# Altium PCB V.PcbDoc
Units mm, origin at the board's own origin, x right, y up, seen from the top; angles counter-clockwise.
Board outline 152.4 x 101.6 mm, 4 copper layers (Top Layer, Internal Plane 1, Internal Plane 2, Bottom Layer); 10 components, 11 nets, 83 pads, 42 vias.
Unrouted connection lines stored in the file: 8.
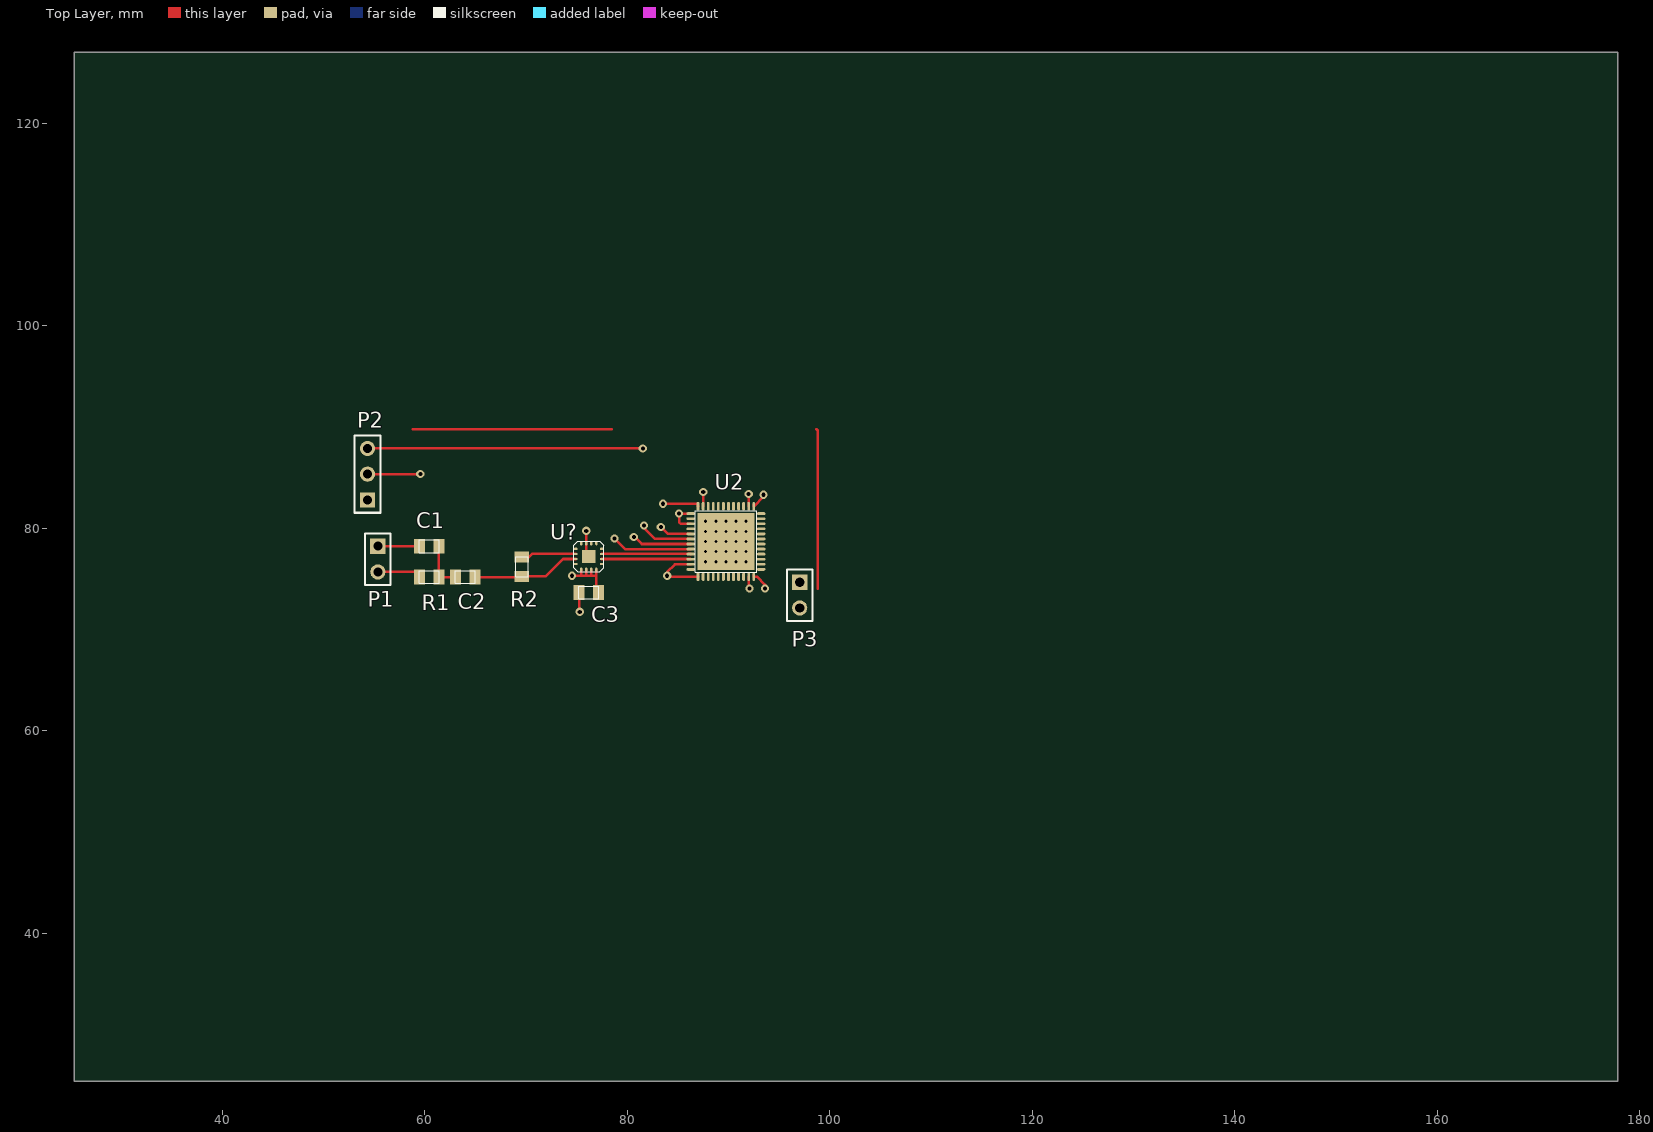
[diagram p0: Top Layer view]
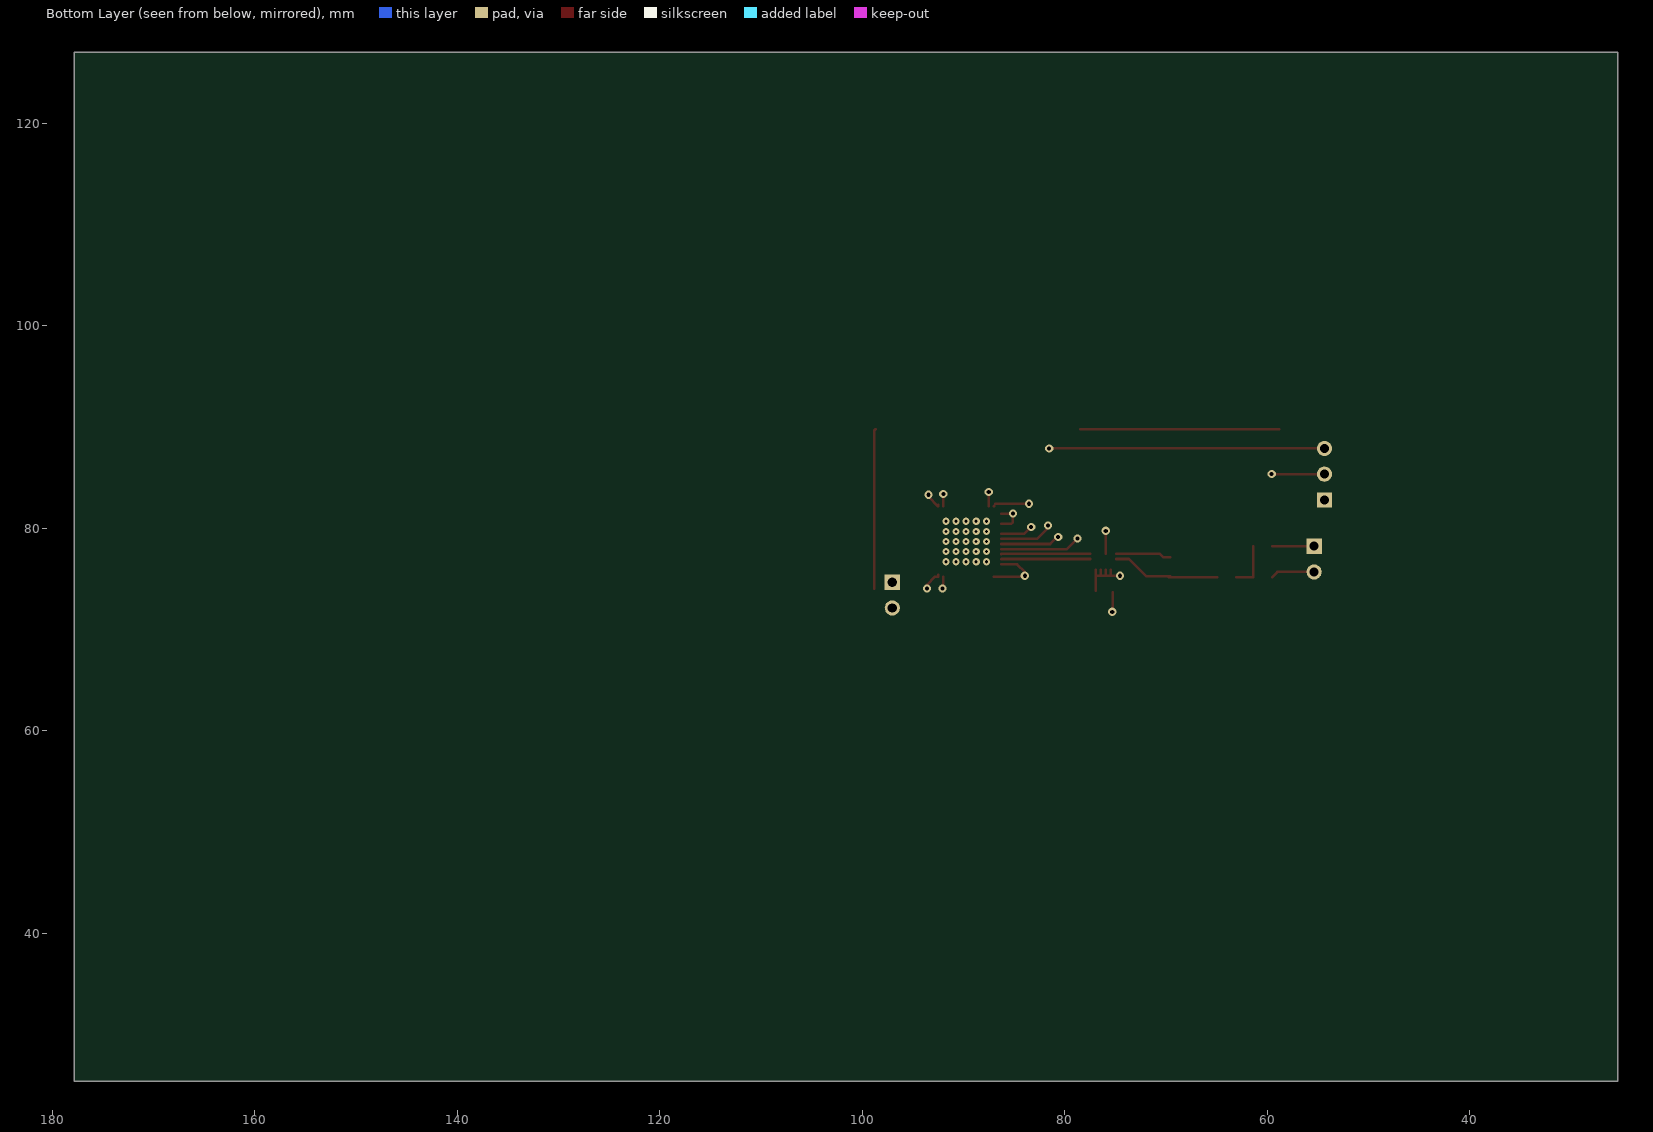
[diagram p1: Bottom Layer view, seen from below]
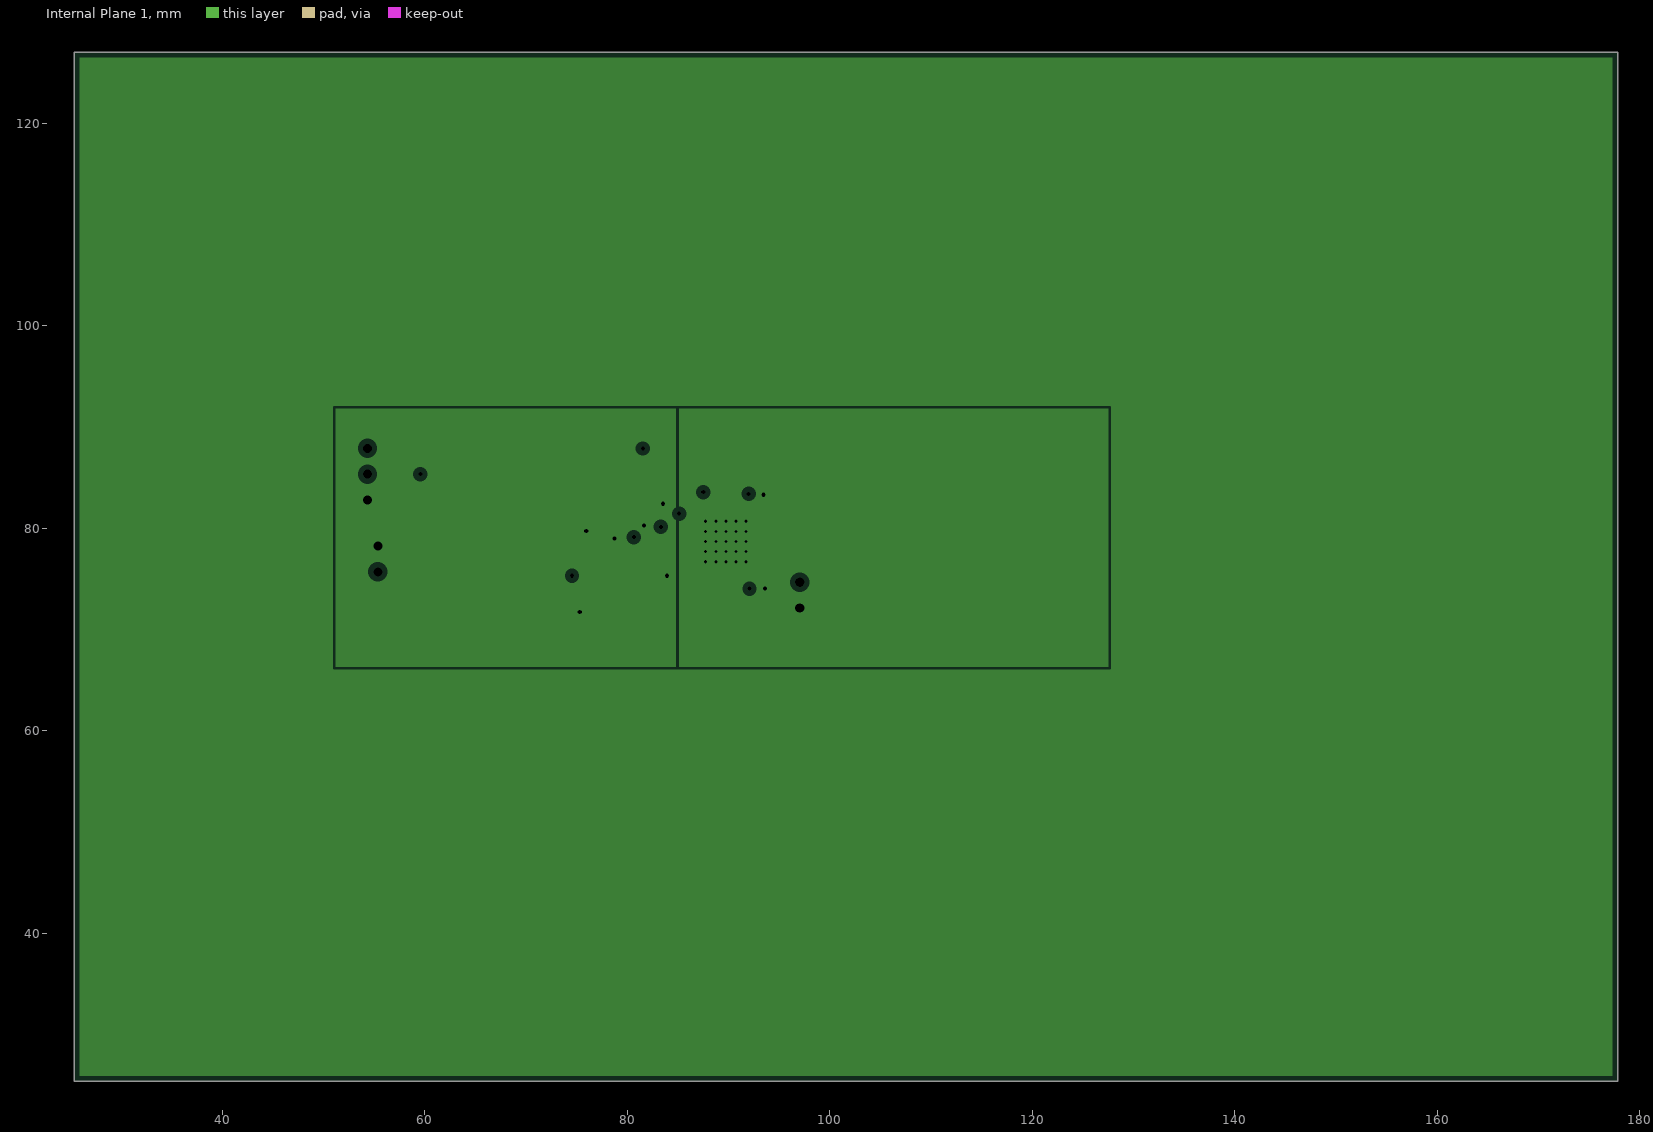
[diagram p2: Internal Plane 1, clearances drawn from the general rule]
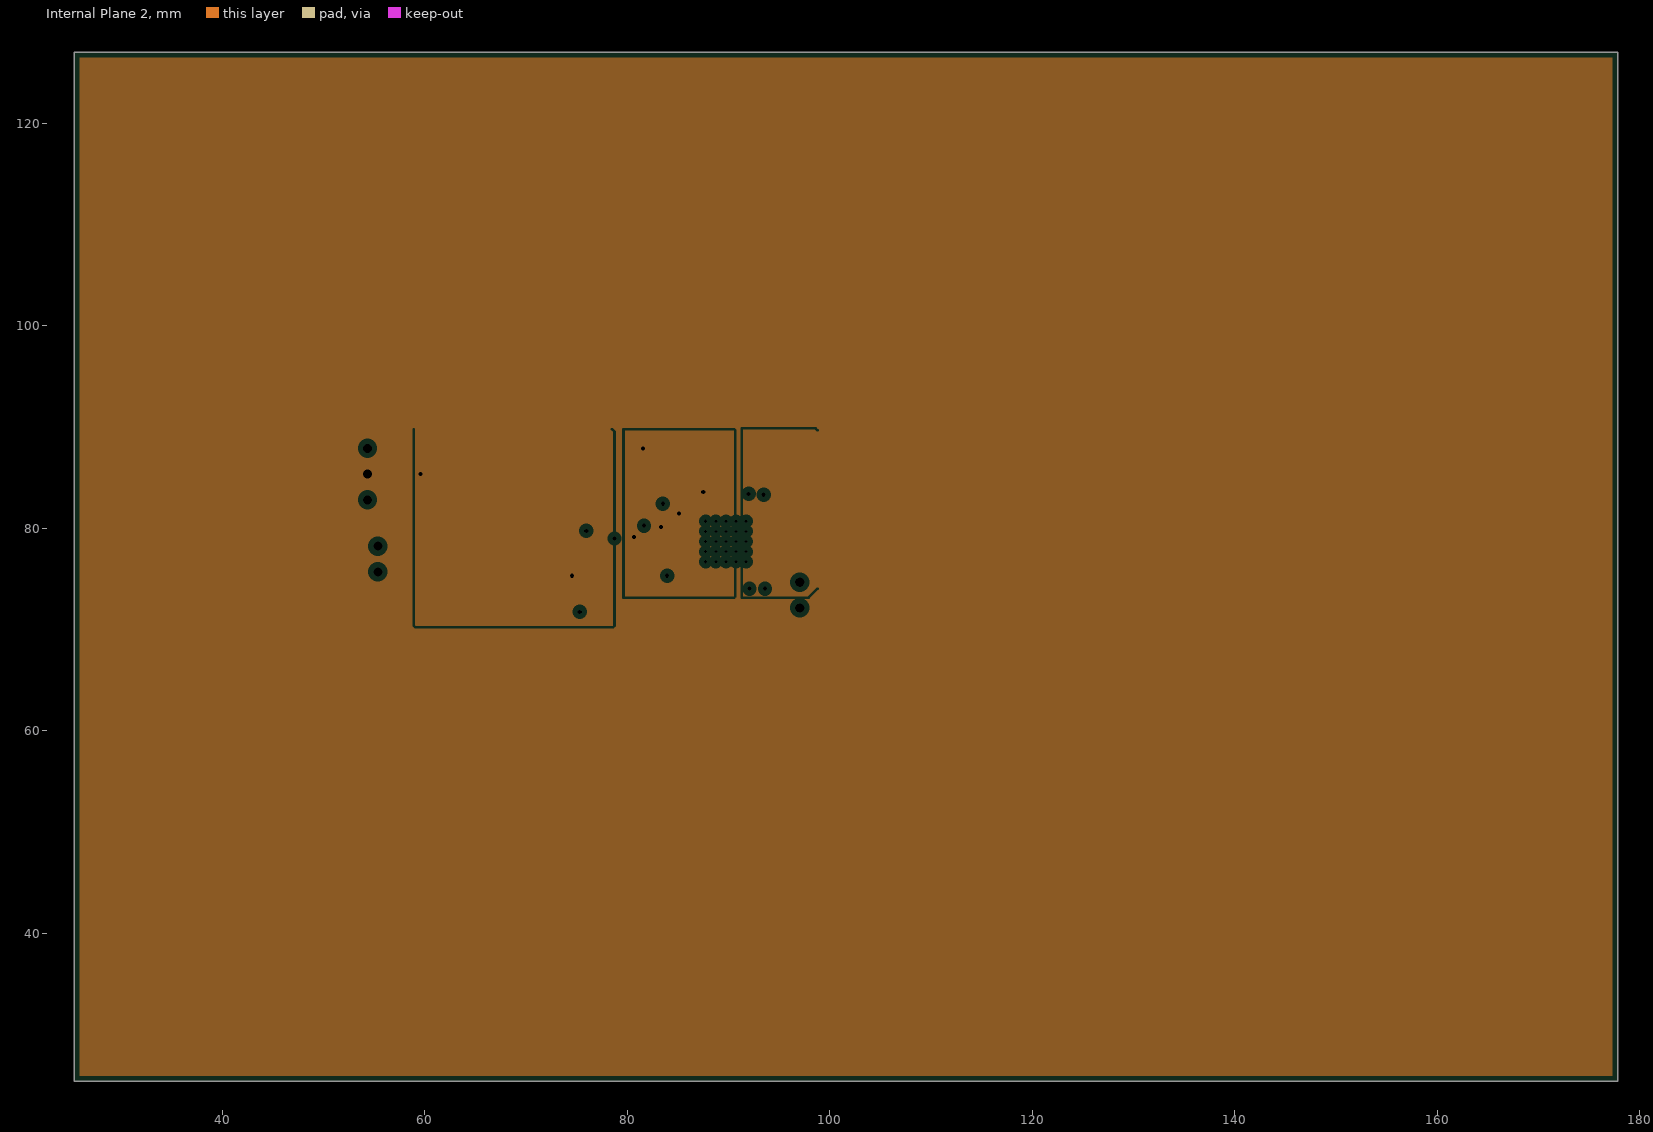
[diagram p3: Internal Plane 2, clearances drawn from the general rule]

## Layer stack, top to bottom
Top Layer: signal copper 0.0356
Dielectric: core 0.32, FR-4, Dk 4.8
Internal Plane 1: plane copper 0.0356, net (Multiple Nets)
Dielectric: prepreg 0.32, FR-4, Dk 4.8
Internal Plane 2: plane copper 0.0356, net (Multiple Nets)
Dielectric: core 0.32, FR-4, Dk 4.8
Bottom Layer: signal copper 0.0356

## Board outline
25.4,25.4 177.8,25.4 177.8,127 25.4,127

## Design rules (kind name [scope] priority, off if disabled: settings)
Clearance [All] p1: gap=0
MinimumSolderMaskSliver [All] p1 off: minsoldermaskwidth=0.254
PlaneClearance [All] p1: clearance=0.508
PlaneConnect [All] p1: planeconnectstyle=Relief reliefexpansion=0.508 reliefentries=4 reliefconductorwidth=0.254 reliefairgap=0.254
PolygonConnect [All] p1: connectstyle=Relief reliefconductorwidth=0.254 reliefentries=4 polygonreliefangle="90 Angle"
RoutingVias [All] p1 off: holewidth=0.711 width=1.27 viastyle="Through Hole" minholewidth=0.711 minwidth=0.635 maxholewidth=0.711 maxwidth=1.524
SilkscreenOverComponentPads [All] p1 off: minsilkscreentomaskgap=0.254
SolderMaskExpansion [All] p1: expansion=0.102
Width [All] p1: maxlimit=0.254 minlimit=0.254 preferedwidth=0.254
24 further rules are at their usual default settings.

## Components (designator, comment, footprint, x,y, rotation, side; value= is the part's Value field where it differs from the comment)
C1 "3.3pF" 0805 60.452,78.232 r180 top
C2 "3.3pF" 0805 64.008,75.184 r0 top
C3 "0.1uF" 0805 76.2,73.66 r180 top
P1 "Header 2" HDR1X2 55.372,78.232 r270 top
P2 "Header 3" HDR1X3 54.356,82.804 r90 top
P3 "Header 2" HDR1X2 97.028,74.676 r270 top
R1 "4.7k" 0805 60.452,75.184 r0 top
R2 "1.5k" 0805 69.596,76.2 r270 top
U2 "ADS61B49" QFN-48 93.218,75.946 r180 top
U? "ADA4932-1" LFCSP-16 76.2,77.216 r0 top

## Footprints (in the part's own frame and the unit in brackets; to place one, negate y for a bottom-side part, rotate by r counter-clockwise, add the part's x,y. Pads: shape width x height; smd on the part's side, far side on the other; paste and mask are expansions set on the pad)
0805 [mm]
  rect 1.1x1.45 smd: 1(-0.95,0) 2(0.95,0)
  silkscreen extent -1,-0.62 1,0.63, body extent -1,-0.62 1,0.62, height 0.5
HDR1X2 [mm] "Connector; Header; 2 Position"
  rect 1.5x1.5 hole 0.9: 1(0,0)
  round 1.5 hole 0.9: 2(2.54,0)
  silkscreen extent -1.27,-1.27 3.81,1.27
HDR1X3 [mm] "Connector; Header; 3 Position"
  rect 1.5x1.5 hole 0.9: 1(0,0)
  round 1.5 hole 0.9: 2(2.54,0) 3(5.08,0)
  silkscreen extent -1.27,-1.27 6.35,1.27
LFCSP-16 [mm] "ADA4932-1,"
  oval 0.4x0.23 smd mask+0.07: 1(-1.3,0.75) 2(-1.3,0.25) 3(-1.3,-0.25) 4(-1.3,-0.75) 9(1.3,-0.75) 10(1.3,-0.25) 11(1.3,0.25) 12(1.3,0.75)
  oval 0.23x0.4 smd mask+0.07: 5(-0.75,-1.3) 6(-0.25,-1.3) 7(0.25,-1.3) 8(0.75,-1.3) 13(0.75,1.3) 14(0.25,1.3) 15(-0.25,1.3) 16(-0.75,1.3)
  rect 1.3x1.3 smd: 17(0,0)
  silkscreen extent -1.5,-1.5 1.5,1.5
QFN-48 [mm] "ADS61B49"
  rect 5.6x5.6 smd: 0(3.475,-2.75)
  oval 0.28x0.85 smd mask+0.07: 1(0.725,0.725) 2(1.225,0.725) 3(1.725,0.725) 4(2.225,0.725) 5(2.725,0.725) 6(3.225,0.725) 7(3.725,0.725) 8(4.225,0.725) 9(4.725,0.725) 10(5.225,0.725) 11(5.725,0.725) 12(6.225,0.725) 25(6.225,-6.225) 26(5.725,-6.225) 27(5.225,-6.225) 28(4.725,-6.225) 29(4.225,-6.225) 30(3.725,-6.225) 31(3.225,-6.225) 32(2.725,-6.225) 33(2.225,-6.225) 34(1.725,-6.225) 35(1.225,-6.225) 36(0.725,-6.225)
  oval 0.85x0.28 smd mask+0.07: 13(6.95,0) 14(6.95,-0.5) 15(6.95,-1) 16(6.95,-1.5) 17(6.95,-2) 18(6.95,-2.5) 19(6.95,-3) 20(6.95,-3.5) 21(6.95,-4) 22(6.95,-4.5) 23(6.95,-5) 24(6.95,-5.5) 37(0,-5.5) 38(0,-5) 39(0,-4.5) 40(0,-4) 41(0,-3.5) 42(0,-3) 43(0,-2.5) 44(0,-2) 45(0,-1.5) 46(0,-1) 47(0,-0.5) 48(0,0)
  silkscreen extent 0.43,-5.8 6.53,0.3

## Part data
C1 C2 C3: library part Capacitor
P1 P3: "Header, 2-Pin"
P2: "Header, 3-Pin"
R1 R2: library part Resistor

## Via types
v1: diameter 0.7, hole 0.3, Top Layer to Bottom Layer, 25 vias
v2: diameter 0.8, hole 0.4, Top Layer to Bottom Layer, 17 vias

## Nets (pads, with @x,y where several pads share a name; then routed paths per layer and width w, separated by ;. In a path a pad name is that pad's centre, name@x,y a point inside that pad or via, vN(x,y) a via of type N, cw(c..) or ccw(c..) an arc to the next point about the centre after c; other vN are vias at no path point)
+1.8V: P3.1 U2.2 U2.35 | length 2.6
  Top Layer w0: U2.2@91.993,74.885 U2.2
  Top Layer w0.254: v2@91.993,74.213 U2.2 ; U2.35 v2(91.993,83.394)
  other v2: 92.075,74.041
+3.3V: P2.3 U2.8 U2.18 U2.20 U2.22 U2.24 U2.26 | length 40.4
  Top Layer w0.254: P2.3@54.483,87.757 P2.3 v2@81.28,87.884 ; v2@80.899,78.994 81.447,78.446 U2.18 ; v2@83.566,79.883 84.003,79.446 U2.20 ; U2.22 85.272,80.446 85.129,80.589 v2(85.129,81.446) U2.24 ; U2.26 87.493,83.175 87.503,83.185 v2@87.503,83.82
  other v2: 80.645,79.121 83.312,80.137 87.503,83.566 81.534,87.884
+5V: C3.1 P2.2 U?.5 U?.6 U?.7 U?.8 | length 11.7
  Top Layer w0.254: P2.2 v2@59.817,85.344 ; v2(74.549,75.311) 75.438,75.311 ; U?.5@75.438,75.904 75.438,75.311 ; 75.95,75.315 U?.6 ; 76.45,75.315 U?.7 ; C3.1@76.95,73.86 76.95,75.311 ; U?.8 76.95,75.311 ; 75.438,75.311 76.95,75.311
  other v2: 59.563,85.344
DRGND: P3.2 U2.1 U2.36 | length 3.7
  Top Layer w0.254: U2.1@92.493,75.384 U2.1 92.8,75.221 93.599,74.422 v2(93.599,74.041) ; U2.36@92.493,82.333 U2.36 93.472,83.15 v2(93.472,83.312)
  other v1: 87.743,76.696 88.743,76.696 89.743,76.696 90.743,76.696 91.743,76.696 87.743,77.696 88.743,77.696 89.743,77.696 90.743,77.696 91.743,77.696 87.743,78.696 88.743,78.696 89.743,78.696 90.743,78.696 91.743,78.696 87.743,79.696 88.743,79.696 89.743,79.696 90.743,79.696 91.743,79.696 87.743,80.696 88.743,80.696 89.743,80.696 90.743,80.696 91.743,80.696
GND: C1.2 C3.2 P1.1 P2.1 U2.0 U2.9 U2.12 U2.14 U2.17 U2.19 U2.25 U?.13 U?.14 U?.15 U?.16 U?.17 | length 30.6
  Top Layer w0.254: P1.1 C1.2 ; v2@75.25,71.948 C3.2 ; U?.17@75.95,77.466 U?.15 v2(75.95,79.752) ; v2(78.74,78.994) 79.788,77.946 U2.17 ; v2@81.534,80.137 82.725,78.946 U2.19 ; v2(83.517,82.423) U2.25@86.868,82.423 ; v2(83.947,75.311) 83.947,75.676 84.717,76.446 U2.14 ; v2@84.111,75.221 U2.12 ; U2.25@86.956,82.208 U2.25
  other v2: 75.311,71.755 81.661,80.264
NetC1_1: C1.1 C2.1 R1.2 | length 4.7
  Top Layer w0.254: C1.1 R1.2 C2.1
NetC2_2: C2.2 R2.2 U?.3 | length 10.8
  Top Layer w0.254: C2.2 R2.2@69.723,75.184 ; R2.2 71.948,75.25 73.664,76.966 U?.3
NetP1_2: P1.2 R1.1 | length 4.3
  Top Layer w0.254: P1.2 58.994,75.692 R1.1
NetR2_1: R2.1 U?.2 | length 5.4
  Top Layer w0.254: R2.1 70.292,77.15 70.612,77.47 U?.2@74.896,77.47
NetU2_15: U2.15 U?.10 | length 8.8
  Top Layer w0.254: U?.10 86.248,76.966 U2.15
NetU2_16: U2.16 U?.11 | length 8.8
  Top Layer w0.254: U?.11 86.248,77.466 U2.16
pads on no net: U2.3 U2.4 U2.5 U2.6 U2.7 U2.10 U2.11 U2.13 U2.21 U2.23 U2.27 U2.28 U2.29 U2.30 U2.31 U2.32 U2.33 U2.34 U2.37 U2.38 U2.39 U2.40 U2.41 U2.42 U2.43 U2.44 U2.45 U2.46 U2.47 U2.48 U?.1 U?.4 U?.9 U?.12
copper on no net: | length 35.5
  Top Layer w0.254: 58.801,89.789 78.486,89.789 ; 98.679,89.789 98.806,89.662 98.806,74.041

## Polygon pours and split planes (outlines as drawn)
GND on Internal Plane 1 (split plane): 84.834,66.296 51.183,66.296 51.183,91.819 84.834,91.819
DRGND on Internal Plane 1 (split plane): 127.506,66.296 85.092,66.296 85.092,91.819 127.506,91.819
GND on Internal Plane 1 (split plane): 177.29,25.91 25.91,25.91 25.91,126.49 177.29,126.49
+3.3V on Internal Plane 2 (split plane): 90.549,89.608 90.549,73.333 90.497,73.281 79.758,73.281 79.758,89.66 90.497,89.66
+5V on Internal Plane 2 (split plane): 177.29,25.91 25.91,25.91 25.91,126.49 177.29,126.49

## Other copper
Internal Plane 1 (plane layer: these items are gaps in the copper):
  lines w0.254: 84.963,66.167 84.963,91.948 ; 51.054,66.167 51.054,91.948 97.409,91.948 127.635,91.948 127.635,66.167 97.536,66.167 51.054,66.167
Internal Plane 2 (plane layer: these items are gaps in the copper):
  lines w0.254: 58.928,89.789 58.928,70.358 59.055,70.231 61.214,70.231 65.532,70.231 67.691,70.231 78.613,70.231 ; 78.486,89.789 78.74,89.535 78.74,70.358 ; 98.806,74.041 97.917,73.152 91.313,73.152 91.313,89.866 98.602,89.866 98.806,89.662 ; 78.613,70.231 78.74,70.358 ; 78.613,70.231 78.74,70.358 ; 79.629,73.152 79.629,89.789 90.551,89.789 90.678,89.662 90.678,73.279 90.551,73.152 79.629,73.152